# EAGLE board A+T Speed  Depth Interface V1_0 (EAGLE 8.4.0)
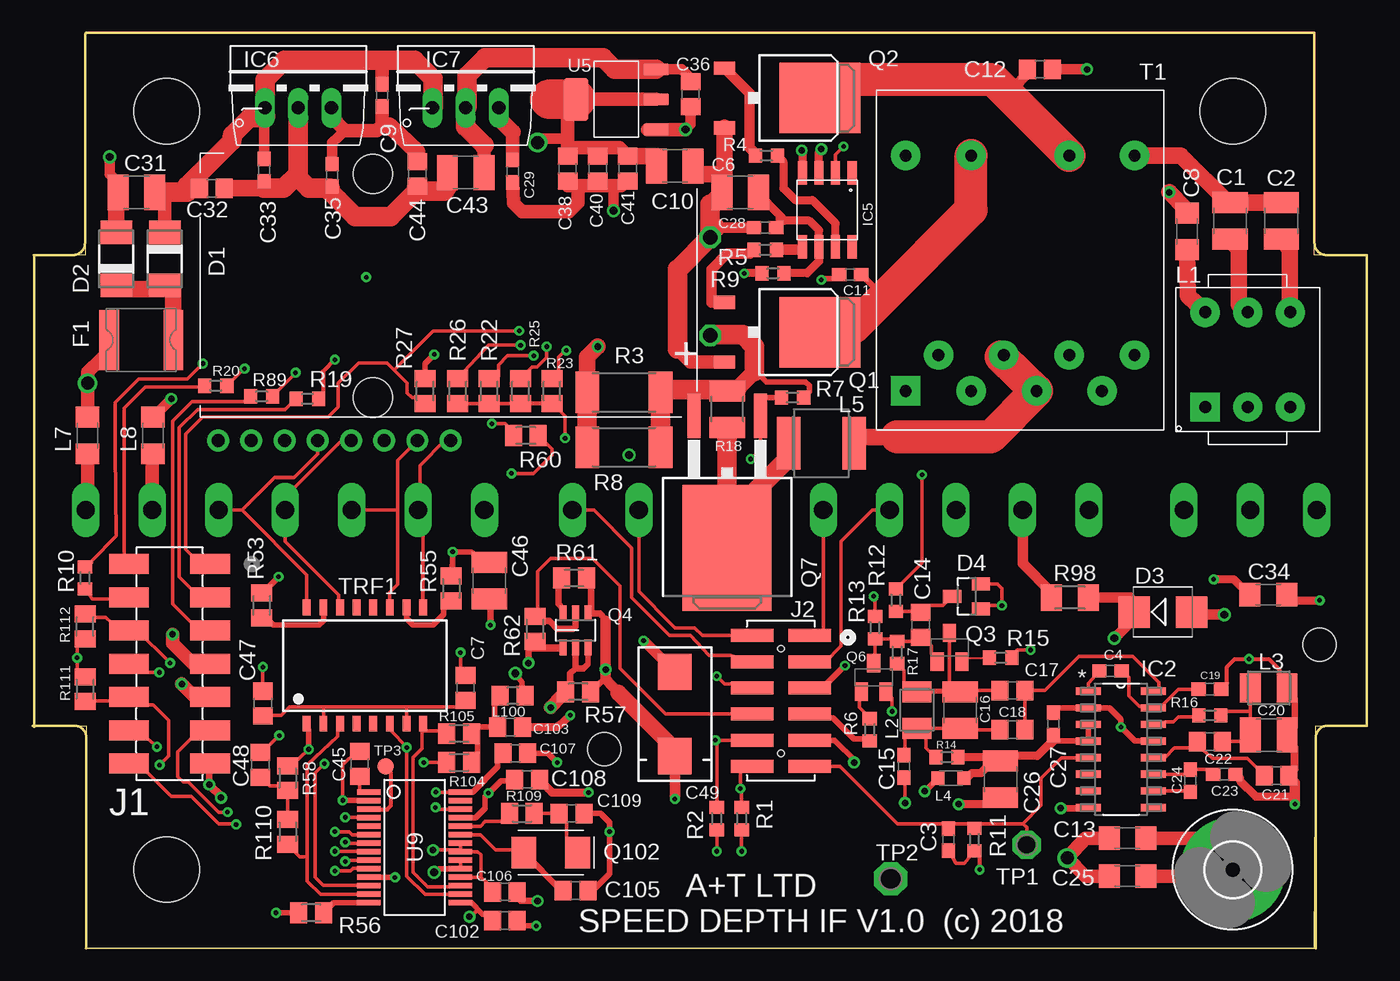
[diagram p0: board, top side]
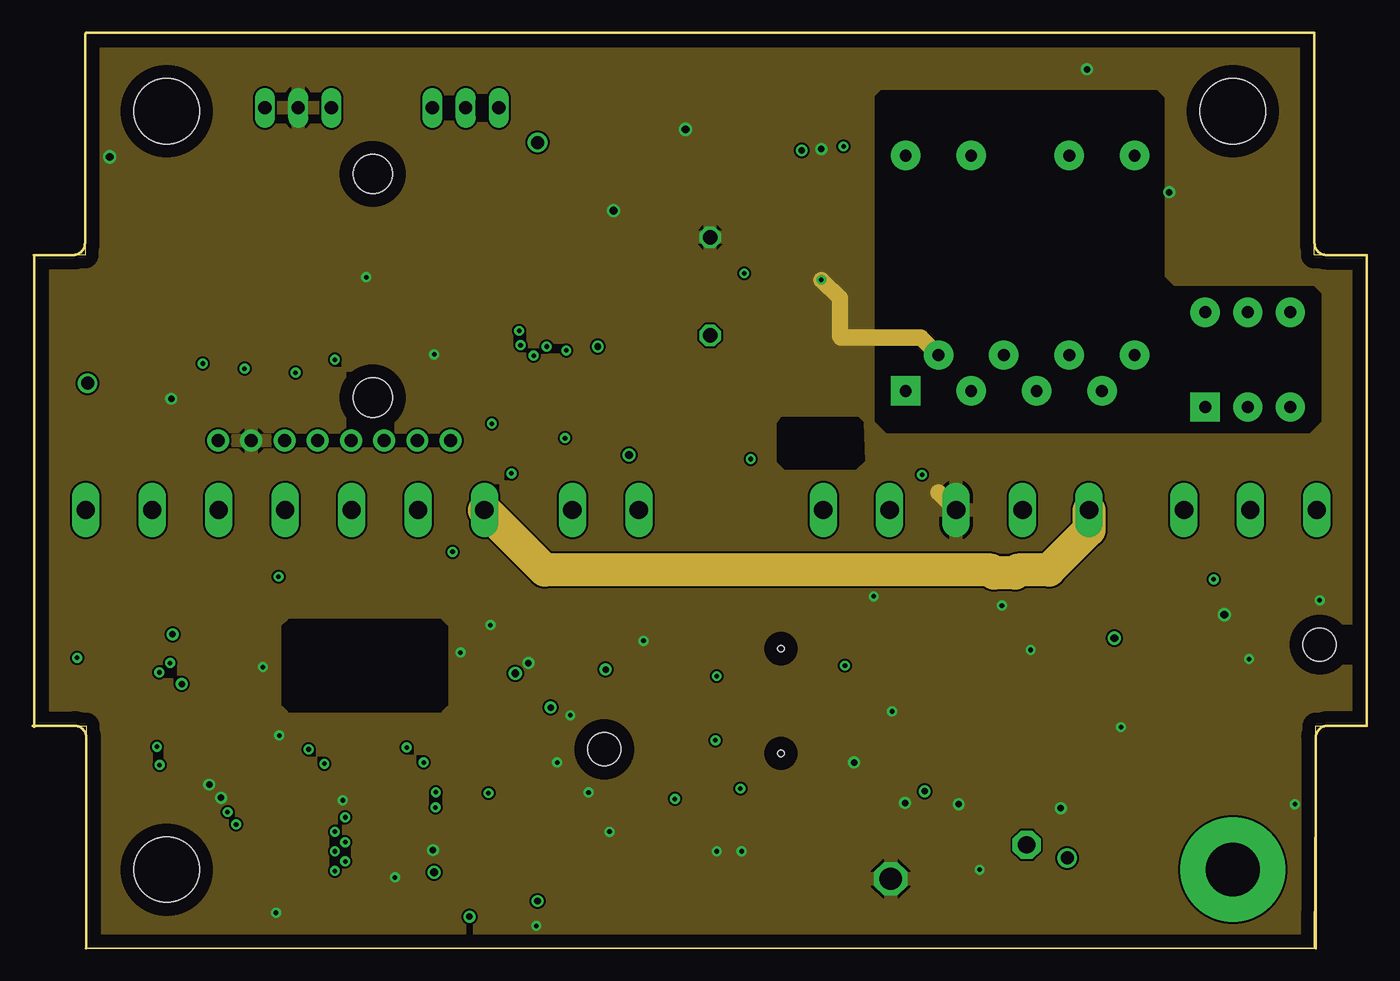
[diagram p1: board, inner layer GNDS]
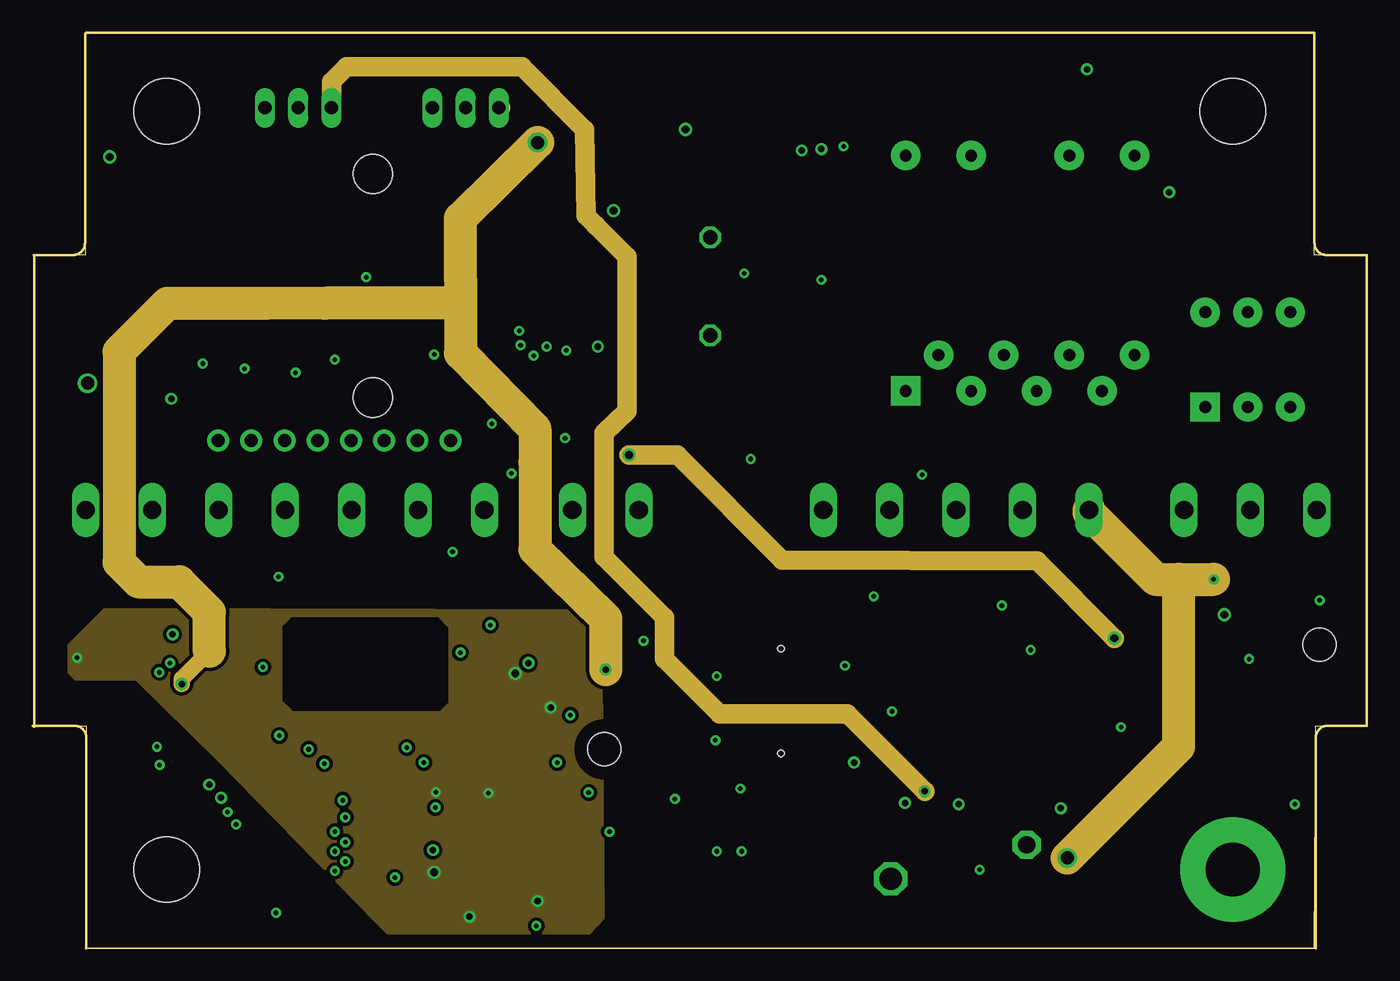
[diagram p2: board, inner layer POWER]
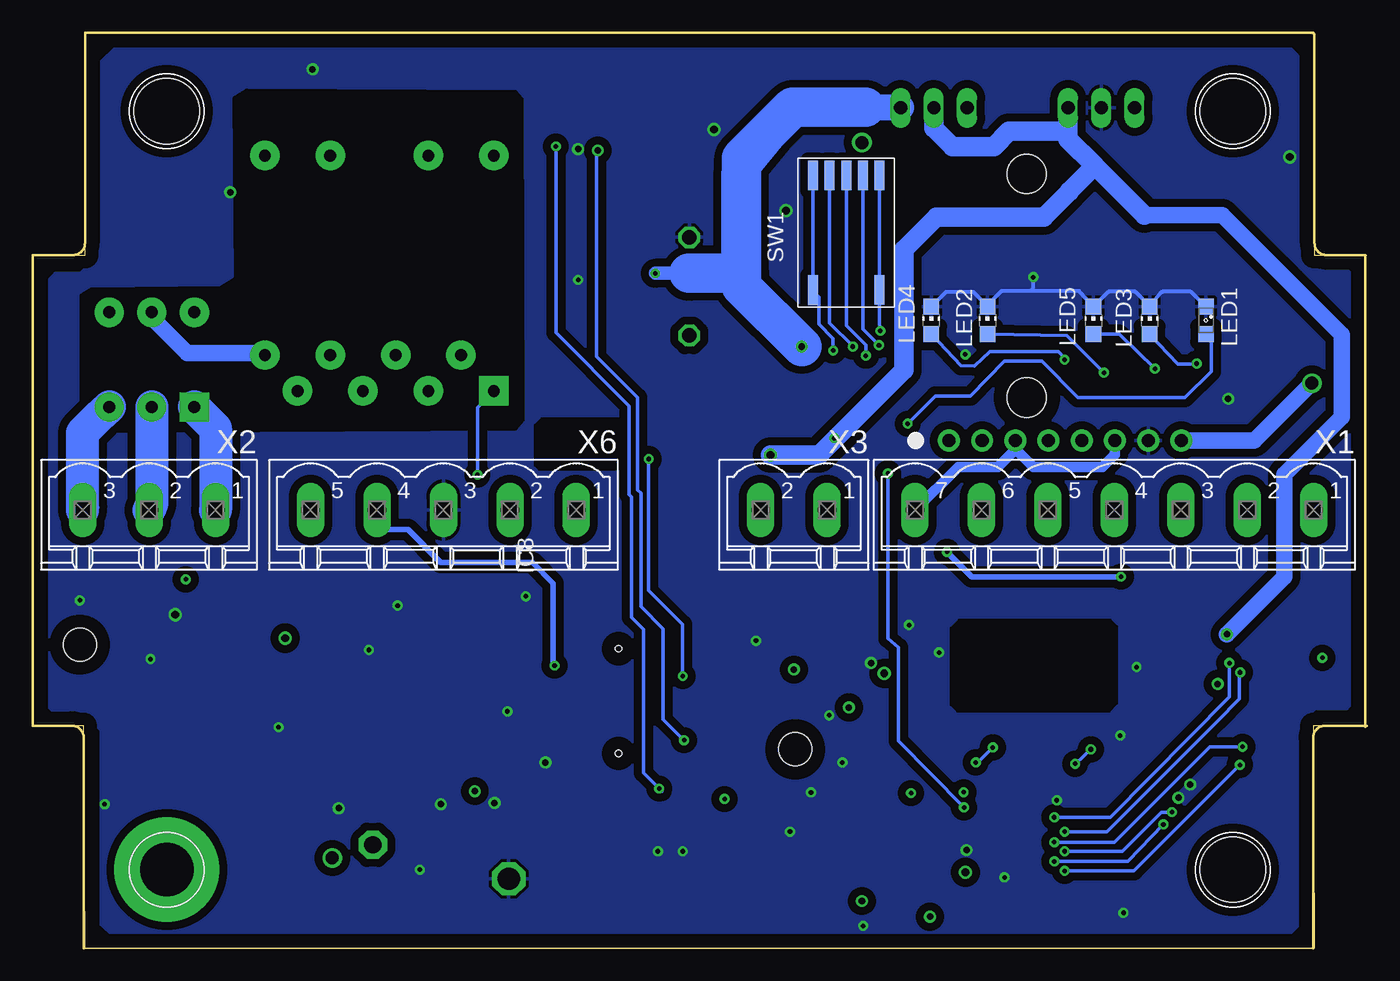
[diagram p3: board, bottom side, seen from below]

Size 102 x 70 mm. Coordinates in mm from the lower left corner, seen from the top.
Outline: 4.1,0 4,0 4.1,17 3.2,17
Outline: 4.1,0 98,0 98.1,17 98.6,17
Outline: 98.6,53 98,53 98,53.9
Outline: 4.1,70 4,70 4,53.9
Outline: 4,53.9 4,53 3.2,53
Outline: 3.2,53 3.1,53
Outline: 3.1,53 0.1,53
Outline: 0.1,53 0,53
Outline: 98,53.9 98,69.9 98,70 4.1,70
Outline: 98.1,0 98.1,16.1 arc-90 99,17 102,17 102,17.1 102,53 98.9,53 arc-90 98,53.9
Outline: 4.1,0 4.1,16.1 arc90 3.2,17
Outline: 0,17 3.2,17
Outline: 4,53.9 arc-90 3.1,53
Outline: 3.2,53 0.2,53 0.1,52.9
Outline: 0.1,52.9 0.1,53
Outline: 0.1,52.9 0.1,16.9
Outline: 4,53.9 4,69.9 4.1,70
Copper layers ((1*2)+(15*16)): Top 0.035mm / dielectric 0.5mm / GNDS 0.035mm / dielectric 0.5mm / POWER 0.035mm / dielectric 0.5mm / Bottom 0.035mm
Design rules "default *": minimum track width 6mil, minimum drill 0.35mm, track to track 6mil, track to pad 6mil, pad to pad 6mil, via to via 6mil, smd to smd 6mil, copper to edge 40mil, drill to drill 6mil, minimum pad ring 10mil, minimum via ring 8mil, stop-mask expansion 4mil, vias tented up to drill 30mil, thermal gap 10mil
Net classes: 1 GND: width 0.2 mm, drill 0.2 mm, clearance 0.2 mm to class 0, clearance 0.2 mm; 2 5V: width 0.2 mm, drill 0.2 mm, clearance 0.2 mm to class 0, clearance 0.2 mm; 3 3v3: width 0.2 mm, drill 0.2 mm, clearance 0.2 mm to class 0, clearance 0.2 mm to class 1, clearance 0.2 mm to class 2, clearance 0.2 mm
Holes 5 mm at 10.25,6 10.25,64 91.75,64
Holes 3 mm at 26,59.2 26,42.1
Holes 2.54 mm at 43.7,15.2 98.4,23.2
tKeepout: area 86.7,1 to 96.7,11; area 5.2,1 to 15.2,11; area 87.5,59.8 to 96,68.2; area 6,59.8 to 14.5,68.2; area 12.5,41.7 to 47,59.7; area 40.4,12.7 to 45.4,17.7; area 96,20.7 to 101,25.7; area 41.5,13 to 45.9,17.4

## Footprints (pad centres in the part's own frame; a part is rotated, then mirrored left to right if it is on the bottom)
C1210 = smd 1.6 x 2.7: 1 -1.4,0; 2 1.4,0
C0603 = smd 1.1 x 1: 1 -0.85,0; 2 0.85,0
CAPH38_20_75 = drill 1.1 octagon: P$1 -16,3.75; P$2 -16,-3.75
C0805 = smd 1.3 x 1.5: 1 -0.95,0; 2 0.95,0
C1206 = smd 1.6 x 1.8: 1 -1.4,0; 2 1.4,0
CAPC7343X31 = smd 2.77 x 2.55: + 3.22,0; - -3.22,0
DO-214AC = smd 1.8 x 2.4: A 2.025,0; C -2.025,0
SMB = smd 2.4 x 2.4: A 2.2,0; C -2.2,0
SOT23 = smd 1 x 1.4: 1 -0.95,-1.1; 2 0.95,-1.1; 3 0,1.1
MF-SMDF050 = smd 1.5 x 4.6: 1 -2.45,0; 2 2.45,0
4,1-PAD = drill 4.1 pad 8: B4,1 0,0
SOIC127P600X175-16N = smd 1.905 x 0.559: 1 -2.489,4.445; 2 -2.489,3.175; 3 -2.489,1.905; 4 -2.489,0.635; 5 -2.489,-0.635; 6 -2.489,-1.905; 7 -2.489,-3.175; 8 -2.489,-4.445; 9 2.489,-4.445; 10 2.489,-3.175; 11 2.489,-1.905; 12 2.489,-0.635; 13 2.489,0.635; 14 2.489,1.905; 15 2.489,3.175; 16 2.489,4.445
TC4428 = smd 1.8 x 0.7: !OUTA 2.84,0.635; !OUTB 2.84,-1.905; GND -2.84,-0.635; INA -2.84,0.635; INB -2.84,-1.905; NC -2.84,1.905; NC2 2.84,1.905; VDD 2.84,-0.635
OKI-78 = drill 1.016 long: 1 -2.54,-2.54; 2 0,-2.54; 3 2.54,-2.54
INTERFACE_BOARD = drill 1 pad 1.676: 1 19.05,3.81; 2 21.59,3.81; 3 24.13,3.81; 4 26.67,3.81; 5 29.21,3.81; 6 31.75,3.81; 7 34.29,3.81; 8 36.83,3.81
CONN_14WAY_SMT = smd 1.524 x 3.048: 1 10.16,-3.683; 2 10.16,2.54; 3 7.62,-3.683; 4 7.62,2.54; 5 5.08,-3.683; 6 5.08,2.54; 7 2.54,-3.683; 8 2.54,2.54; 9 0,-3.683; 10 0,2.54; 11 -2.54,-3.683; 12 -2.54,2.54; 13 -5.08,-3.683; 14 -5.08,2.54
CONN-12-WAY-SMT = smd 1 x 3.25: 1 4,-2.2; 2 4,2.2; 3 2,-2.2; 4 2,2.2; 5 0,-2.2; 6 0,2.2; 7 -2,-2.2; 8 -2,2.2; 9 -4,-2.2; 10 -4,2.2; 11 -6,-2.2; 12 -6,2.2 | hole 0.5: 3,0; -5,0
3CM_CHOKE = drill 0.9 pad 2.25 square: P$1 3.625,-3.25 | drill 0.9 pad 2.25: P$2 3.625,0; P$3 3.625,3.25; P$4 -3.625,3.25; P$5 -3.625,0; P$6 -3.625,-3.25
L3225M = smd 1.6 x 2.2: 1 -1.4,0; 2 1.4,0
L2012C = smd 1 x 1: 1 -1,0; 2 1,0
L5650M = smd 1.8 x 4: 1 -2.5,0; 2 2.5,0
INDC2012X90 = smd 1.3 x 1.5: 1 -0.95,0; 2 0.95,0
SML0805 = smd 1.2 x 1.2: A 1.05,0; C -1.05,0
CHIP-LED0805 = smd 1.2 x 1.2: A 0,-1.05; C 0,1.05
D-PAK_TO252AA = smd 1 x 1.6: 1 -2.28,-4.8; 3 2.28,-4.8 | smd 5.4 x 6.2: 4 0,2.5
SOT23-BEC = smd 1 x 1.4: B -0.95,-1.1; C 0,1.1; E 0.95,-1.1
SOT23-6 = smd 0.55 x 1.2: 1 -0.95,-1.3; 2 0,-1.3; 3 0.95,-1.3; 4 0.95,1.3; 5 0,1.3; 6 -0.95,1.3
TO263 = smd 1 x 3.4: 1 -2.54,-6.6; 2 2.54,-6.6 | smd 6.8 x 9.6: 3 0,3.5
ABRACON-ABM3 = smd 1.9 x 2.4: 1 -2.05,0; 2 2.05,0
R0603 = smd 1 x 1.1: 1 -0.85,0; 2 0.85,0
R2512 = smd 1.8 x 3.2: 1 -2.8,0; 2 2.8,0
R1210 = smd 1.6 x 2.7: 1 -1.4,0; 2 1.4,0
M0805 = smd 1.3 x 1.6: 1 -0.95,0; 2 0.95,0
M3216 = smd 1.6 x 2: 1 -1.4,0; 2 1.4,0
10_WAY_ROTARY_MCR7 = smd 2.261 x 0.762: 1 -4.378,1.27; 2 -4.378,-1.27; 4_1 -4.385,-2.54; 4_2 4.385,-2.54; 8 -4.385,0; C1 -4.385,2.54; C2 4.378,2.54
LEGACY = drill 0.9 pad 2.25 square: P$1 10,-8.75 | drill 0.9 pad 2.25: P$2 7.25,-6.25; P$3 10,-3.75; P$4 7.25,-1.25; P$5 10,1.25; P$6 7.25,3.75; P$7 10,6.25; P$8 7.25,8.75; P$9 -8,8.75; P$10 -8,3.75; P$11 -8,-3.75; P$12 -8,-8.75
P1-13 = drill 1.321 pad 2.159 octagon: TP 0,0
P1-17 = drill 1.702 pad 2.54 octagon: TP 0,0
B1,27 = smd 1.27 x 1.27: TP 0,0
N5 = smd 0.6 x 1.2: 1 -4.445,-4.445; 2 -3.175,-4.445; 3 -1.905,-4.445; 4 -0.635,-4.445; 5 0.635,-4.445; 6 1.905,-4.445; 7 3.175,-4.445; 8 4.445,-4.445; 9 4.445,4.445; 10 3.175,4.445; 11 1.905,4.445; 12 0.635,4.445; 13 -0.635,4.445; 14 -1.905,4.445; 15 -3.175,4.445; 16 -4.445,4.445
SOT230P700X180-4L = smd 0.89 x 1.88: 1 -2.3,-3.065; 2 0,-3.065; 3 2.3,-3.065 | smd 3.23 x 1.88: 4 0,3.065
SOP65P780X200-28N = smd 0.45 x 1.9: 1 -4.225,-3.505; 2 -3.575,-3.505; 3 -2.925,-3.505; 4 -2.275,-3.505; 5 -1.625,-3.505; 6 -0.975,-3.505; 7 -0.325,-3.505; 8 0.325,-3.505; 9 0.975,-3.505; 10 1.625,-3.505; 11 2.275,-3.505; 12 2.925,-3.505; 13 3.575,-3.505; 14 4.225,-3.505; 15 4.225,3.505; 16 3.575,3.505; 17 2.925,3.505; 18 2.275,3.505; 19 1.625,3.505; 20 0.975,3.505; 21 0.325,3.505; 22 -0.325,3.505; 23 -0.975,3.505; 24 -1.625,3.505; 25 -2.275,3.505; 26 -2.925,3.505; 27 -3.575,3.505; 28 -4.225,3.505
MSTBV7 = drill 1.397 long: 1 -15.24,0; 2 -10.16,0; 3 -5.08,0; 4 0,0; 5 5.08,0; 6 10.16,0; 7 15.24,0
MSTBV3 = drill 1.397 long: 1 -5.08,0; 2 0,0; 3 5.08,0
MSTBV2 = drill 1.397 long: 1 -2.54,0; 2 2.54,0
MSTBV5 = drill 1.397 long: 1 -10.16,0; 2 -5.08,0; 3 0,0; 4 5.08,0; 5 10.16,0

## Placement (x,y rotation side)
C1  22n 400V  [C1210]  91.54,55.6 270 top
C2  22n 400V  [C1210]  95.46,55.61 90 top
C3  1n  [C0603]  70,8.3 270 top
C4  100n  [C0603]  82.4,21.2 0 top
C5  CAPH38_20_75  [CAPH38_20_75]  35.8,50.6 180 top
C6  10u  [C1210]  54.1,57.8 180 top
C7  10n  [C0805]  33.1,19.9 90 top
C8  100n 100V  [C1206]  88.25,54.81 90 top
C9  100n  [C0603]  26.7,65.2 270 top
C10  47u,6.3V  [C1210]  49.1,59.8 0 top
C11  100n  [C0603]  62.5,51.5 180 top
C12  100n  [C0805]  77,67.2 0 top
C13  100n 100V  [C1206]  83.7,8.4 180 top
C14  1n  [C0805]  67.9,24.7 270 top
C15  100p  [C0603]  66.6,13.9 270 top
C16  6800p  [C1210]  70.9,18.2 90 top
C17  1n  [C0805]  74.9,19.7 0 top
C18  1n  [C0805]  74.9,16.7 0 top
C19  100n  [C0603]  90,19.8 0 top
C20  6800p  [C1210]  94.5,16.3 0 top
C21  1n  [C0805]  95.1,13.2 0 top
C22  1n  [C0805]  90,15.8 0 top
C23  100n  [C0603]  91.1,13.3 0 top
C24  100n  [C0603]  88.5,12.8 90 top
C25  100n 100V  [C1206]  83.7,5.5 180 top
C26  10u  [C1210]  73.99,12.91 270 top
C27  100n  [C0603]  78.05,17.15 90 top
C28  100n  [C0603]  56,55.1 180 top
C29  100n  [C0603]  36.7,59.4 270 top
C31  10u 35V  [C1210]  7.93,57.8 180 top
C32  DNF  [C0805]  13.7,58.1 0 top
C33  100n 50V  [C0603]  17.7,59.5 270 top
C34  100n 100V  [C1206]  94.47,27.01 0 top
C35  100n  [C0603]  22.9,59.1 270 top
C36  100n  [C0805]  50.3,65.3 270 top
C38  100n  [C0805]  40.9,59.6 270 top
C40  22u  [C0805]  43.2,59.6 90 top
C41  22u  [C0805]  45.5,59.6 90 top
C43  10u  [C1210]  33.1,59.3 180 top
C44  DNF  [C0805]  29.4,59.2 270 top
C45  10u  [C0805]  25,14.1 90 top
C46  1n 2kV  [C1210]  34.9,28.1 270 top
C47  10n  [C0805]  17.6,18.7 90 top
C48  100n  [C0805]  17.4,14 90 top
C49  220u  [CAPC7343X31]  49.1,17.9 270 top
C102  100n  [C0805]  36.1,2.1 0 top
C103  100n  [C0805]  36.5,16.9 0 top
C105  27p  [C0805]  41.5,4.4 0 top
C106  100n  [C0805]  36.1,4.3 180 top
C107  100n  [C0805]  36.9,14.9 0 top
C108  100n  [C0805]  37.8,12.9 0 top
C109  27p  [C0805]  41.2,10.3 0 top
D1  SS16  [DO-214AC]  10.1,52.7 270 top
D2  SMBJ36CA  [DO-214AC]  6.4,52.7 90 top
D3  SMBJ6.0A-M3/H  [SMB]  86.4,25.7 0 top
D4  BAV99  [SOT23]  71.4,26.9 90 top
F1  MF-SMDF050  [MF-SMDF050]  8.3,46.5 0 top
H3  MOUNT-PAD-ROUND4.1  [4,1-PAD]  91.75,6 0 top
IC2  SA614AD/01  [SOIC127P600X175-16N]  83.2,15.2 0 top
IC5  TC4427ACOA  [TC4428]  60.75,56.45 270 top
IC6  78SR_SWITCHING_REG05TV  [OKI-78]  20.3,66.8 0 top
IC7  78SR_SWITCHING_REG05TV  [OKI-78]  33.1,66.8 0 top
IC8  Toby B06-1X8 –AG1-G  [INTERFACE_BOARD]  51,35 0 bottom
J1  CONN-14WAY-SMT  [CONN_14WAY_SMT]  9.9,19.2 90 top
J2  CONN_12WAY_SMT  [CONN-12-WAY-SMT]  57.2,19.9 90 top
L1  custom  [3CM_CHOKE]  92.9,45 270 top
L2  120u  [L3225M]  67.6,18.2 90 top
L3  120u  [L3225M]  94.5,19.9 0 top
L4  2u2  [L2012C]  70.2,13 0 top
L5  SRN5040-3R3M  [L5650M]  60.3,38.6 0 top
L7  Laird HI1206T500R-1  [C1206]  4.2,39.2 90 top
L8  Laird HI1206T500R-1  [C1206]  9.2,39.2 90 top
L100  120R@100M  [INDC2012X90]  36.7,19.3 180 top
LED1  GRN  [SML0805]  12.3,48 270 bottom
LED2  [CHIP-LED0805]  29,48 0 bottom
LED3  [CHIP-LED0805]  16.6,48 0 bottom
LED4  [CHIP-LED0805]  33.3,48 0 bottom
LED5  [CHIP-LED0805]  20.9,48 0 bottom
Q1  FDD5670  [D-PAK_TO252AA]  57.7,47.1 270 top
Q2  FDD5670  [D-PAK_TO252AA]  57.7,65 270 top
Q3  BC848C  [SOT23-BEC]  70.1,23 0 top
Q4  TPS2708  [SOT23-6]  41.5,24.3 0 top
Q6  BC848C  [SOT23-BEC]  64.3,20.7 0 top
Q7  SUM110P06-08L  [TO263]  53.1,34.1 180 top
Q102  25MHz  [ABRACON-ABM3]  39.6,7.3 180 top
R1  1k  [R0603]  54.2,9.9 90 top
R2  1k  [R0603]  52.3,9.9 90 top
R3  15R  [R2512]  45.2,42.5 0 top
R4  100R  [R0603]  56.1,60.6 0 top
R5  100R  [R0603]  56,53.4 0 top
R6  1k  [R0603]  64,16.7 270 top
R7  1k  [R0603]  58.1,42.1 180 top
R8  15R  [R2512]  45.2,38.3 0 top
R9  10R  [R0603]  56.6,51.6 180 top
R10  1k  [R0603]  4,28.3 270 top
R11  56k  [R0603]  72,8.3 270 top
R12  1k  [R0603]  66,26.6 90 top
R13  22k  [R0603]  64.4,24.5 90 top
R14  1k  [R0603]  69.9,14.6 180 top
R15  820R  [R0603]  74,22.2 0 top
R16  1k  [R0603]  90,17.8 0 top
R17  33k  [R0603]  66.1,22.6 90 top
R18  10R  [R1210]  53.1,41.2 90 top
R19  1k  [R0603]  21,42 180 top
R20  1k  [R0603]  14,43 180 top
R22  1k  [M0805]  34.9,42.6 270 top
R23  2k  [M0805]  39.7,42.6 270 top
R25  4k02  [M0805]  37.3,42.6 270 top
R26  8k06  [M0805]  32.5,42.6 270 top
R27  1k  [M0805]  30,42.6 270 top
R53  75R  [M0805]  17.5,26.2 90 top
R55  75R  [M0805]  32,27.5 90 top
R56  2.32k 1%  [M0805]  21.3,2.7 0 top
R57  DNF  [M0805]  41.7,19.6 0 top
R58  49R9  [M0805]  19.5,13 90 top
R60  180R  [M0805]  37.7,39.2 0 top
R61  DNF  [M0805]  41.4,28.3 0 top
R62  100k  [M0805]  38.4,24.4 90 top
R89  1k  [R0603]  17.5,42.2 180 top
R98  100mA fuse for 50mA out  [M3216]  79.3,26.8 0 top
R104  49R9  [M0805]  32.6,14.2 180 top
R105  49R9  [M0805]  32.6,16.4 0 top
R109  100R  [M0805]  37.4,10.3 180 top
R110  49R9  [M0805]  19.5,8.9 90 top
R111  100k  [M0805]  4,19.8 90 top
R112  100k  [M0805]  4,24.6 270 top
SW1  10_WAY_ROTARY_MCR7  [10_WAY_ROTARY_MCR7]  39.8,54.7 270 bottom
T1  XFMR_DPT  [LEGACY]  75.5,52.6 270 top
TP1  TPPAD1-13  [P1-13]  76,7.9 90 top
TP2  PTR1PAD1-17  [P1-17]  65.6,5.3 0 top
TP3  TPB1,27  [B1,27]  27,13.9 0 top
TRF1  HX1188NL  [N5]  25.4,21.6 0 top
U5  AZ1117  [SOT230P700X180-4L]  44.6,64.9 90 top
U9  ENC28J60-SOP  [SOP65P780X200-28N]  29.2,7.7 270 top
X1  MSTBV7  [MSTBV7]  19.3,33.5 180 bottom
X2  MSTBV3  [MSTBV3]  93.1,33.5 180 bottom
X3  MSTBV2  [MSTBV2]  43.8,33.5 180 bottom
X6  MSTBV5  [MSTBV5]  70.6,33.5 180 bottom

## Library data of the parts
C1-C4 C6-C29 C31-C36 C38 C40 C41 C43-C48 C102 C103 C105-C109 L2-L5 L7 L8 R1-R20 R22 R23 R25-R27 R53 R55-R58 R60-R62 R89 R98 R104 R105 R109-R112 = rcl
C5 IC6-IC8 J1 J2 LED1 Q7 = AWR
C49 = Capacitors_AandT; DIGIKEY: 399-12105-1-ND; MANUFACTURER: Kemet; MOUSER: 80-T598D107M016E050; MPN: T598D107M016ATE050; PACKAGE: 7343; VOLTAGE: 16V
D1-D4 = diode
F1 = fuse
H3 = holes
IC2 = NXP SA614; MPN: SA614AD/01; OC_FARNELL: 2212075; OC_NEWARK: 55W4422; PACKAGE: SOIC-16; SUPPLIER: NXP
IC5 = mosefet Driver
L1 T1 = Wound A+T
L100 = IND_AandT; FARNELL: 1635711; MANUFACTURER: WURTH; MPN: 74279202; RS: 358-6721
LED2-LED5 = led
Q1 Q2 = MOSFET_N_TO252
Q3 Q6 = transistor-npn
Q4 = Transistor_AandT; FARNELL: 2323775; MANUFACTURER: TI; MARKING: AUA; MPN: TPS27081A; PACKAGE: SOT23-6; RS: 809-5429
Q102 = Crystals_AnT; FARNELL: 2101328
SW1 = AWR; FARNELL: 2083032; PART_NO: Multicomp MCR7M4-10RA-V-B
TP1-TP3 = testpad
TRF1 = Magnetics_AandT
U5 = ICs_AandT; MANUFACTURER: DIODES INC; MPN: AZ1117CH-3.3TRG1; PACKAGE: SOT223-3; RS: 828-7609
U9 = Microchip_AandT; DIGIKEY: ENC28J60-I/SS-ND; FARNELL: 1811239; MANUFACTURER: MICROCHIP; MPN: ENC28J60-I/SS; PACKAGE: SSOP-28; RS: 770-7755
X1 = con-phoenix-508; OC_FARNELL: unknown; OC_NEWARK: unknown
X2 = con-phoenix-508; MPN: MSTBV 2,5/3-GF-5.08; OC_FARNELL: 1792793; OC_NEWARK: 69R9846
X3 = con-phoenix-508; MPN: MSTBV 2,5/2-GF-5.08; OC_FARNELL: 1792792; OC_NEWARK: 69R9845
X6 = con-phoenix-508; MPN: MSTBV 2,5/5-GF-5.08; OC_FARNELL: 1792795; OC_NEWARK: 69R9848

## Nets
5V_SENSOR_SUPPLY: J2.5 R98.1 X6.4
+3V3: C10.1 C38.1 C40.2 C41.2 C49.+ J1.9 Q4.4 R57.2 R61.2 U5.2 U5.4
+5V: C9.2 C35.1 C36.1 C43.1 C44.1 D3.C IC6.3 IC7.2 J1.7 L4.1 R22.2 R23.2 R25.2 R26.2 R98.2 U5.3
+10V: C29.1 IC7.3 R3.1 R8.1 R9.2
+V_IN: F1.1 IC8.8 L7.2
ETHRX+: IC8.4 TRF1.14 X1.4
ETHRX-: IC8.5 TRF1.16 X1.3
ETHTX+: IC8.1 TRF1.9 X1.6
ETHTX-: IC8.2 TRF1.11 X1.5
GND: C3.2 C5.P$2 C6.2 C7.2 C8.2 C10.2 C11.2 C12.2 C15.2 C19.2 C20.2 C21.2 C23.2 C26.2 C27.2 C28.2 C29.2 C31.2 C32.2 C33.2 C34.2 C35.2 C36.2 C38.2 C40.1 C41.1 C43.2 C44.2 C45.2 C46.2 C47.2 C48.2 C49.- C102.2 C103.2 C105.2 C106.2 C107.2 C108.2 C109.2 D2.A D3.A D4.1 D4.2 IC2.2 IC2.8 IC2.13 IC5.GND IC6.2 IC8.7 J1.13 J2.9 L3.2 L8.2 LED1.C LED2.C LED3.C LED4.C LED5.C Q1.3 Q2.3 Q4.1 Q6.E R1.1 R2.1 R11.2 R13.2 R15.2 R27.1 R56.1 R62.1 T1.P$2 TP2.TP U5.1 U9.2 U9.11 U9.18 U9.21 U9.22 X6.3
LDA: LED1.A R60.1
LEDB: R60.2 U9.26
N$1: J2.7 R6.2
N$2: C109.1 Q102.1 R109.1
N$3: R55.1 TRF1.10
N$4: Q4.6 R61.1
N$5: IC2.14 R16.1
N$6: C4.1 IC2.1
N$7: C4.2 C19.1 IC2.15
N$8: C23.1 C24.2 IC2.11
N$9: C24.1 IC2.10
N$10: Q3.E R15.1
N$11: C20.1 C22.2 L3.1 R16.2
N$12: C15.1 C16.1 C18.1 L2.1 R14.2
N$13: C16.2 C17.1 L2.2 Q3.C R17.1
N$14: C14.2 Q3.B Q6.C R13.1 R17.2
N$15: C14.1 D4.3 R12.1
N$16: C8.1 L1.P$6
N$17: C11.1 Q1.4 T1.P$11
N$18: R12.2 T1.P$1
N$19: C12.1 Q2.4 T1.P$10
N$20: C6.1 C28.1 IC5.VDD R9.1
N$21: C1.2 L1.P$5 T1.P$8
N$22: C2.1 L1.P$4
N$23: C1.1 C2.2 T1.P$9
N$24: Q1.1 R5.1
N$25: Q2.1 R4.1
N$26: IC5.INA J2.12 R1.2
N$27: J1.2 R20.2
N$28: R109.2 U9.24
N$29: Q6.B R6.1
N$30: J2.2 X3.2
N$31: L7.1 X1.1
N$32: LED3.A R10.1
N$33: L1.P$3 X2.3
N$35: L1.P$2 X2.2
N$36: L1.P$1 X2.1
N$37: IC5.!OUTA R4.2
N$38: IC5.!OUTB R5.2
N$39: L5.1 Q7.3 R18.1
N$40: J1.3 R19.2
N$41: D1.A D2.C F1.2
N$42: J1.4 R10.2
N$43: R22.1 SW1.8
N$44: R23.1 SW1.4_1 SW1.4_2
N$45: R25.1 SW1.2
N$46: R26.1 SW1.1
N$47: J2.4 X3.1
N$48: L5.2 T1.P$4 T1.P$5
N$49: C5.P$1 Q7.2 R3.2 R7.1 R8.2 R18.2
N$51: LED2.A R89.1
N$52: IC5.INB J2.10 R2.2
N$53: LED4.A R19.1
N$55: LED5.A R20.1
N$56: J1.5 R89.2
N$57: C26.1 C27.1 IC2.3 IC2.4 L4.2 R14.1
N$59: L8.1 X1.2
N$64: C45.1 U9.1
N$67: C46.1 R53.2 R55.2
N$72: R53.1 TRF1.15
N$80: C7.1 C47.1 TRF1.2 TRF1.7
N$160: C48.1 R58.1 R110.2
OSC1: C105.1 Q102.2 U9.23
PHY3V3: C102.1 C106.1 C107.1 C108.1 L100.1 Q4.2 Q4.3 R57.1 R111.2 R112.2 U9.15 U9.19 U9.20 U9.25 U9.28
PHY-POWER: J2.8 Q4.5 R62.2
PHY_CS: J1.14 U9.9
PHY_INTERRUPT: J1.6 R112.1 U9.4
PHY_RESET: J1.10 R111.1 U9.10
PHY_SCK: J1.11 U9.8
PHY_SI: J1.12 U9.7
PHY_SO: J1.8 U9.6
PHYCLKOUT: TP3.TP U9.3
RBIAS: R56.2 U9.14
ROTARY_SWITCH: J1.1 R27.2 SW1.C1 SW1.C2
RSSI: C3.1 IC2.5 J2.11 R11.1 TP1.TP
RX1: C17.2 C18.2 IC2.16
RX2: C21.1 C22.1 IC2.12
SCREEN [GND]: C13.2 C25.2 C34.1 IC8.3 IC8.6 X1.7 X6.5
SCREEN1 [GND]: C13.1 C25.1 H3.B4,1
SPEED: J2.1 X6.1
TEMPERATURE: J2.3 X6.2
TP3V3: C103.1 L100.2 R104.1 R105.2
TPIN+: R110.1 TRF1.3 U9.13
TPIN-: R58.2 TRF1.1 U9.12
TPOUT+: R105.1 TRF1.8 U9.17
TPOUT-: R104.2 TRF1.6 U9.16
TX_POWER: J2.6 Q7.1 R7.2
VIN_FUSED [5V]: C9.1 C31.1 C32.1 C33.1 D1.C IC6.1 IC7.1

## Tracks (layer width: path | path; a pad name or v marks a point on that pad's centre or on a via)
5V_SENSOR_SUPPLY  (via drill 0.35)
  Top 0.406: J2.5 60.4,19.9 v62.1,21.6
  Top 0.813: 75.68,32.52 X6.4 75.7,33.48 75.7,29.4 77.9,27.2 R98.1
  Bottom 0.406: X6.4 74.9,32.72 74.9,32.1 74.8,32 73.3,32 70.8,29.5 63.8,29.5 62.2,27.9 62.2,21.7 v62.1,21.6
+3V3  (via drill 0.35, 0.5, 1)
  Top 0.254: 42.45,25.95 Q4.4 | 42.7,27.95 R61.2
  Top 0.508: 42.7,25.6 42.7,27.95 | 42.45,25.55 Q4.4 42.7,25.6 | R57.2 43.8,20.65 | 43.8,25 43.5,25.47 43.37,25.6 42.7,25.6
  Top 0.813: v49.1,11.4 C49.+ | 44.8,19.5 43.8,20.6 43.8,20.65 v43.8,21.3 43.8,25 | 40.9,61.9 38.9,61.9 v38.6,61.6
  Top 1.016: J1.9 12.4,19.2 v11.4,20.2 | U5.2 U5.4 41.14,64.9 40.9,64.66 40.9,61.9 40.9,60.6 | 40.9,60.6 C38.1 | 40.9,60.6 41.5,61.2 43.3,61.2 | 43.3,61.2 44.85,61.2 C41.2 | C40.2 43.2,61.09 43.3,61.2
  Top 1.27: C49.+ 48.9,15.4 44.8,19.5 | C41.2 47.75,60.55 C10.1
  Top 3: U5.4 39.5,64.9
  POWER 1.27: v11.4,20.2 11.4,20.6 13.5,22.7
  POWER 2.54: 32.7,51.2 32.7,45.5 38.4,39.7 38.4,37.15 38.4,30.5 43.8,25.2 v43.8,21.3 | 13.5,22.7 13.5,25.7 11.2,28 8.1,28 6.6,29.5 6.6,45.6 10.3,49.3 17.83,49.3 22.34,49.31 32.69,49.31 32.7,51.2 | v38.6,61.6 32.7,55.8 32.7,51.2
+5V  (via drill 0.35, 0.5, 0.6)
  Top 0.254: 37.38,41.65 R22.2 R26.2 | R23.2 39.75,41.65 40.7,40.7 v40.7,39
  Top 0.305: R23.2 37.38,41.65 R25.2
  Top 0.406: L4.1 v68.2,12
  Top 0.813: C35.1 22.9,61.6 23.9,62.5 | 27.3,62.9 26.92,62.9 26.7,63.12 | 33,64.26 IC7.2 | C36.1 50.55,66.25 49.6,67.2 U5.3 | R98.2 83.9,26.8 83.7,26.7 D3.C 83.6,24.6 v82.7,23.7
  Top 1.016: J1.7 12.26,21.74 10.7,23.3 v10.7,24 | C9.2 26.7,63.12 26.7,62.9 26.3,62.5 23.9,62.5 22.8,63.6 22.8,64.22 IC6.3 | C43.1 34.5,61.4
  Top 1.27: C44.1 29.4,60.9 27.3,62.9
  Top 1.5: U5.3 44.5,67.2 43.6,68.1 34.6,68.1 33.2,66.7 33.2,64.36 IC7.2 33.1,62.8 34.5,61.4
  POWER 1.5: IC6.3 22.84,66.24 24,67.4 37.4,67.4 42.2,62.6 42.3,56 43.09,55.21 42.99,55.32 45.44,52.87 45.44,41.06 43.7,39.4 43.7,29.9 48.3,25.3 48.3,22.1 52.5,17.9 62.3,17.9 v68.2,12 | v45.6,37.7 49.3,37.7 57.3,29.7 76.8,29.6 v82.7,23.7
  Bottom 0.254: 22.73,57.85 22.73,57.87
  Bottom 1.27: 17.01,56.05 11.05,56.05 1.9,46.9 1.9,40.6 6.3,36.2 6.3,28.4 v10.7,24 | v40.7,39 40.7,38.9 41.9,37.7
  Bottom 1.5: 33.1,64.2 IC7.2 33.1,62.7 31.7,61.3 28.52,61.3 27.35,62.47 23.3,62.47 22.84,62.93 | 22.84,62.93 22.84,61.88 20.78,59.82 | 17.01,56.05 20.78,59.82 | v45.6,37.7 41.9,37.7 35.4,44.2 35.4,53.4 32.9,55.9 24.68,55.9 22.73,57.85 | 22.73,57.87 20.78,59.82 | IC6.3 22.84,62.93
+10V  (via drill 0.35, 0.5)
  Top 0.61: R9.2 v54.4,51.6
  Top 1.016: 35.6,64.22 IC7.3 35.7,64.2 35.7,63.4 | C29.1 36.7,62.4
  Top 1.27: R3.1 42.4,45.2 v43.2,46 | 36.7,62.4 35.7,63.4
  Top 1.5: R3.1 R8.1
  POWER 1.5: IC7.3 35.76,64.26
  Bottom 0.61: 47.8,51.6 47.5,51.7
  Bottom 1.016: 51.82,51.6 v54.4,51.6 | 48.45,51.6 47.8,51.6
  Bottom 2: 38.31,64.3 35.6,64.3 IC7.3
  Bottom 2.54: v43.2,46 45.4,48.2 | 51.82,51.6 48.45,51.6 48.1,51.95 48.1,59.2 43.9,64.3
  Bottom 3: 47.8,51.6 47.8,60.4 43.9,64.3 38.31,64.3 | 47.8,51.6 47.8,50.6 v43.2,46 | 47.8,51.6 51.82,51.6
+V_IN  (via drill 1)
  Top 1.016: L7.2 v4.2,43.2 4.2,44.05 5.2,45 5.85,45.65 F1.1
  Bottom 1.27: v4.2,43.2 8.59,38.81 IC8.8
ETHRX+
  Top 0.254: 23.58,26.13 TRF1.14 23.4,26.14 23.4,27 19.3,31.1 X1.4 19.4,33.6 19.4,34.6 23.61,38.81 IC8.4
ETHRX-
  Top 0.254: IC8.5 21.79,37.79 20,36 18.5,36 16,33.5 | TRF1.16 20.95,28.55 16,33.5 | 16,33.5 X1.3
ETHTX+
  Top 0.254: 29.84,30.03 29.84,33.12 29.48,33.48 | 29.48,33.48 X1.6 | IC8.1 31.51,38.81 29.6,36.9 29.6,33.6 29.48,33.48
  Top 0.305: TRF1.9 29.84,30.03
ETHTX-
  Top 0.254: IC8.2 27.9,37.29 27.9,33.6 | 27.9,33.6 27.9,27.8 27.3,27.2 TRF1.11 | X1.5 27.8,33.5 27.9,33.6
GND  (via drill 0.35, 0.5, 0.6)
  Top 0.152: 95.5,19.3 L3.2 96,19.3 | 80.2,10.7 80.7,10.7 IC2.8
  Top 0.254: U9.22 U9.21 | U9.21 32.58,7.5 v30.6,7.5 | U9.21 34.02,7.38 34.27,7.12 34.27,5.42 | C15.2 66.7,12.95 v66.7,11.1 | D4.1 72.55,26 73,26 73.2,26.2 v74.1,26.2 74.1,27.5 73.75,27.85 D4.2 | R13.2 64.4,26.6 64.5,26.7 v64.3,26.9 | R15.2 74.9,22.2 75.3,22.8 v76.3,22.8 | Q6.E 65.7,19.15 v65.7,18.1 | C3.2 70.05,7.45 70.6,6.5 71.25,6.5 R11.2 | 72.4,6.5 v72.4,6 | 60.12,60.91 v60.3,61.1 | C45.2 24.75,15.05 23.7,14 v23.7,11.3 | C48.2 17.55,14.95 v18.85,16.25 18.9,16.3 | C47.2 v17.6,21.5 | C7.2 32.8,21 32.7,21.1 v32.7,22.6 | 34.92,4.72 C106.2 35.35,4.45 34.27,5.42 | 34.27,5.42 U9.18 | R2.1 v52.3,7.4 | R1.1 v54.2,7.4 | 14.4,11.6 v14.4,11.5 | C35.2 22.88,58.25 22.73,58.1
  Top 0.305: C19.2 91.3,20.25 91.3,21.5 91.9,22.1 v93,22.1 94.5,22.1 95.3,21.3 95.3,20.7 95.9,20.1 L3.2 | v72.4,6 72.4,7.05 R11.2
  Top 0.406: C27.2 78.42,18.38 IC2.2 82.33,18.38 83.2,17.5 v83.2,16.9 84.27,15.84 IC2.13 | R56.1 v18.6,2.7 | U9.11 27.48,5.42 27.5,5.4 v27.7,5.4 | 25.72,11.3 U9.2 25.67,11.3 v23.7,11.3 | C102.2 37.45,1.7 v38.5,1.7 | C105.2 42.8,4.4 44.1,5.7 v44.1,8.9 44.1,9.6 43.4,10.3 C109.2 | C108.2 38.75,12.85 | C107.2 39.4,14.9 v40.1,14.2 | C11.2 61.35,51.2 60.5,51.2 60.4,51.1 v60.3,51.1 | R27.1 30,44.7 v30.7,45.4 | C34.2 96.33,26.6 | J2.9 61.3,15.9 62.9,14.3 v62.8,14.2
  Top 0.508: C20.2 96.5,16.9 96.5,19.07 95.81,19.76 95.81,19.81 L3.2 | IC2.8 80.66,10.7 v78.6,10.7 | C46.2 35,26.6 v35,24.7 | R62.1 38.85,23 Q4.1 40.35,22.9 37.9,22.9 v37.9,21.8 | 40.1,16.9 40.2,17 | J1.13 13.48,13.82 v13.5,12.5
  Top 0.61: C26.2 73.48,11 v70.8,11 | C21.2 96.45,13.7 96.48,13.7 96.48,15.32 C20.2 | C23.2 92,13.3 92.3,13 92.3,12.8 93.5,11.6 96.5,11.6 96.5,12.6 96,13.15 C21.2 | C21.2 96.05,13.05 | IC5.GND 60.12,60.91 | C103.2 40.1,16.9 | 40.2,17 v41.1,17.8 | 38.75,12.85 39.7,11.9 v42.5,11.9 | v13.5,12.5 14.4,11.6 | 96.33,26.6 v98.4,26.6
  Top 0.813: C28.2 52.19,55.1 51.68,55.1 | C12.2 v80.6,67.2 | v96.51,11 96.51,12.64 96,13.15 | L8.2 v10.6,42 | C49.- 46.92,23.3 v46.7,23.5 | C33.2 17.7,58.12 17.68,58.1 | 23.4,57.28 23.35,57.23 | C44.2 29,58.22 29.32,57.9 | C36.2 50.3,63 v49.9,62.6 | 44.4,58.3 v44.4,56.4 | C31.2 6.53,58.57 5.9,59.2 v5.9,60.5 | D3.A 89.3,25.5 v91.1,25.5
  Top 1.016: Q1.3 50.28,44.82 49.3,45.8 | 47,62.6 U5.1 v49.9,62.6 | C41.1 45.35,58.65 45,58.3 44.4,58.3 43.17,58.3 | 41.64,58.3 43.17,58.3 | 41.64,58.3 40.92,58.3 40.9,58.32 C38.2 | C40.1 43.2,58.33 43.17,58.3 | C29.2 36.75,57.05 36.75,56.95 37.4,56.3 41,56.3 41.7,57 41.7,58.24 41.64,58.3
  Top 1.27: C8.2 88.14,56.56 v86.9,57.8 | 51.78,56.88 C6.2 52.7,58.8 52.9,59 52.9,59.85 | D2.A 6.4,57.37 C31.2 | 52.9,59.85 Q2.3 | C10.2 50.5,59.5 50.7,59.2 52.85,59.2 52.9,59.85 | C32.2 17.68,58.1
  Top 1.5: 49.3,45.8 49.3,51.92 49.37,51.92 C5.P$2 | 17.68,58.1 19.2,58.1 20.3,59.2 | IC6.2 20.3,59.2 | 20.3,59.2 20.3,58.9 21.1,58.1 22.73,58.1 22.73,57.85 23.35,57.23 24.65,55.93 27.35,55.93 29.32,57.9 31.5,57.9 31.7,58.2 C43.2 | 51.78,56.88 51.78,54.37 C5.P$2 | C5.P$2 51.8,54.71 52.19,55.1
  GNDS 1.27: 69.25,34.85 X6.3 | T1.P$2 67.9,46.7 61.8,46.7 61.7,46.8 61.7,49.7 v60.3,51.1
  Bottom 0.254: 29.03,49.12 LED2.C
  Bottom 0.305: 25.55,50.25 22,50.25 LED5.C 19.75,50.2 17.7,50.2 LED3.C 15.7,50.15 15.6,50.2 13.45,50.2 LED1.C | LED4.C 32.15,50.2 30.11,50.2 29.03,49.12 27.92,50.24 27.71,50.25 25.55,50.25 | v25.5,51.3 25.5,51.2 25.55,50.25
  pour GNDS: -11.2,92.6 112.2,92.6 123.6,81.2 123.6,6.4 84.4,-32.8 -9,-32.8 -38,-3.8 -38,65.8
  pour Bottom (isolate 0.61): 5,53.3 5,68 6.1,69.2 95.4,69.2 97.1,67.5 97.1,52.9 98.4,51.6 100.3,51.6 101.2,50.7 101.2,18.8 100.1,17.7 97.9,17.7 96.8,16.6 96.8,1.8 95.9,0.9 6,0.9 5,1.9 5,17.2 3.9,18.3 1.5,18.3 0.8,19 0.8,51.2 1.7,52.1 3.8,52.1
LDA  (via drill 0.35)
  Top 0.254: R60.1 36.75,39.45 36.1,40.1 v35.1,40.1
  Bottom 0.254: 35.2,40 v35.1,40.1 33,42.2 30.3,42.2 27.7,44.9 24.84,44.9 22.1,42.1 13.9,42.1 11.9,44.1 11.9,46.6 12.1,46.8 LED1.A
LEDB  (via drill 0.35)
  Top 0.254: U9.26 30.82,10.62 30.8,10.6 v30.8,10.76 | R60.2 39.7,38.15 39.7,37.7 38.3,36.3 v36.6,36.3
  Bottom 0.254: v36.6,36.3 36.6,23.9 36.6,23.7 35.8,23 35.8,15.86 v30.8,10.76
N$1
  Top 0.254: 63.75,15.7 R6.2
  Top 0.406: R6.2 63.85,16 62.8,16 61.2,17.6 60.6,17.6 60.3,17.9 J2.7
N$2
  Top 0.254: R109.1 C109.1 40.8,9.55 40.8,7.9 41.4,7.3 Q102.1
N$3
  Top 0.406: TRF1.10 28.57,25.23 29.1,24.7 30.6,24.7 31.4,25.5 31.4,26.15 R55.1
N$4
  Top 0.508: Q4.6 40.55,25.95 40.2,26.3 40.2,28.05 R61.1
N$5
  Top 0.254: IC2.14 86.41,17.11 86.6,17.3 87.2,17.3 87.6,17.7 89.05,17.7 R16.1
N$6
  Top 0.254: C4.1 80.71,20.26 IC2.1
N$7
  Top 0.152: 86.2,18.2 85.86,18.2 IC2.15 85.03,18.38
  Top 0.254: C4.2 83.35,21.15 83.8,20.7 83.8,19.3 84.6,18.5 85.56,18.5 IC2.15 86.17,18.38 87.6,19.8 C19.1
N$8
  Top 0.254: IC2.11 88.36,13.29 88.28,13.68 | 88.28,13.68 C24.2 | C23.1 90.28,13.68 88.28,13.68
N$9
  Top 0.254: C24.1 88.42,12.03 IC2.10
N$10
  Top 0.152: R15.1 71,22.2 Q3.E
N$11
  Top 0.254: 93.1,16.4 C20.1 | 93.1,16.4 93.1,18.1 | 93.1,18.1 L3.1 | 93.1,18.1 91.15,18.1 R16.2 | C22.2 92.5,15.8 93.1,16.4
N$12
  Top 0.254: 68.3,16.8 L2.1 66.8,16.8 66.7,16.7 66.7,14.85 C15.1 | 68.3,16.8 C16.1 71,16.7 C18.1 | R14.2 68.3,15.3 68.3,16.8
N$13
  Top 0.254: Q3.C 70.1,19.7 67.5,19.7 | 67.5,19.7 L2.2 C16.2 71,19.7 C17.1 | R17.1 66.6,21.25 66.6,20 66.9,19.7 67.5,19.7
N$14
  Top 0.254: 67.85,23.54 68.35,23.4 68.7,23.1 68.7,22.5 69.15,22.05 Q3.B | 67.85,23.54 C14.2 | Q6.C 64.4,21.9 R13.1 65.9,23.65 R17.2 67.76,23.45 67.85,23.54
N$15
  Top 0.254: D4.3 69.6,26.2 68.2,26.2 67.9,25.9 C14.1 67.8,25.75 R12.1
N$16
  Top 1.27: C8.1 88.3,49.9 L1.P$6
N$17
  Top 0.406: C11.1 64.95,49.9 64.95,49.65
  Top 0.813: 58,46.6 59.6,46.7 Q1.4
  Top 2.54: Q1.4 61.6,48.1 62.8,47.5 64.95,49.65 71.75,56.45 T1.P$11
N$18  (via drill 0.35)
  Top 0.254: 66.85,28.3 R12.2 68,29.45 v68,36.2
  Bottom 0.254: T1.P$1 68,41.35 v68,36.2
N$19
  Top 0.152: Q2.4 59.98,64.69 57.5,63.2
  Top 0.813: C12.1 76.05,66.85 75,65.8 73.85,65.8 73.45,66.4
  Top 1.27: 60.5,66.7 Q2.4
  Top 2.54: T1.P$10 73.45,66.4 59.6,66.4 59.98,65.61 59.98,64.69
N$20
  Top 0.61: 55.95,57.15 C6.1 55.5,57.7 57.12,56 | 57.12,56 57.48,55.62 59.38,55.62 60.12,54.88 IC5.VDD 60.12,52.52 59.2,51.6 R9.1 | 56.65,55.1 C28.1 57.12,55.37 57.12,56
N$21
  Top 1.27: C1.2 92.2,53.4 92.2,49.2 L1.P$5 92.55,49.12
  Bottom 1.27: L1.P$5 92.9,48.2 90.2,45.5 84.8,45.5 T1.P$8
N$22
  Top 1.27: C2.1 96.1,53.4 96.1,49.9 L1.P$4
N$23
  Top 1.27: C2.2 95.75,57 C1.1 91.4,57 87.8,60.6 T1.P$9
N$24
  Top 0.813: Q1.1 51.9,49.38 51.9,51.9 53.1,53.1 54.85,53.1 R5.1
N$25
  Top 0.508: 55.25,60.75 R4.1
  Top 0.813: 55.25,60.75 54.8,61.2 54.8,65.38 Q2.1
N$26  (via drill 0.35)
  Top 0.254: IC5.INA 61.38,60.69 v62,61.3 | J2.12 54.9,14 54.3,14 54.1,13.8 v54.1,12.2 54.2,12.1 R1.2
  Bottom 0.254: v62,61.3 62,47.05 56.4,41.45 56.4,34.7 56.2,34.5 56.2,25.28 55.3,24.38 55.3,13.4 v54.1,12.2 53.9,12
N$27
  Top 0.254: J1.2 7,29.72 7,41.3 8.6,42.9 13.05,42.9 R20.2
N$28
  Top 0.254: U9.24 34.23,9.32 34.6,9.7 36.05,9.7 R109.2
N$29
  Top 0.254: R6.1 64.05,17.55 63.2,18.4 63.2,19.45 Q6.B
N$30
  Top 0.254: 48.85,24.75 49,24.6 | 48.85,24.75 46.34,27.26 X3.2 | J2.2 51.2,23.9 50.6,24.5 49.1,24.5 48.85,24.75
N$31
  Top 1.016: X1.1 4.2,33.64 L7.1
N$32  (via drill 0.35)
  Top 0.254: R10.1 4.3,29.3 4.5,29.5 4.5,29.6 6.4,31.5 6.3,38 6.3,41.7 8.1,43.5 11.8,43.5 v13,44.7
  Bottom 0.254: v13,44.7 12.8,44.65 14.45,44.65 15.9,46.2 LED3.A
N$33
  Bottom 2.54: L1.P$3 97.03,40.58 98.2,39.4 98.2,33.88 X2.3
N$34
  cutout Bottom: 86.6,65 85.6,65.6 65.1,65.5 64.6,64.9 64.5,40.4 65.1,39.7 97.7,39.5 97.7,39.6 98.3,40.2 98.3,49.9 97.5,50.4 87.6,50.5 86.5,51.2
N$35
  Bottom 2.54: L1.P$2 92.9,34 X2.2
N$36
  Bottom 2.54: L1.P$1 88.02,39.74 X2.1
N$37
  Top 0.61: IC5.!OUTA 61.38,55.38 61.4,55.4 59.6,57.2 58.3,57.2 57.4,58.1 57.4,60.15 R4.2
N$38
  Top 0.61: IC5.!OUTB 58.8,53.56 58.8,53.5
  Top 0.813: R5.2 58.6,53.4 58.8,53.5
N$39
  Top 1.016: Q7.3 54.6,34.3 | 57.5,37.2 57.7,38.5 L5.1
  Top 1.5: R18.1 Q7.3 | 54.6,34.3 57.5,37.2
N$40
  Top 0.254: J1.3 13,27.4 12.2,27.4 11.2,28.4 11.2,39.8 12.6,41.2 19.3,41.2 19.95,41.85 R19.2
N$41
  Top 1.27: 10.75,50.4 F1.2 | 10.75,50.4 10.45,50.73 D1.A | D2.C 6.38,50.4 10.75,50.4
N$42
  Top 0.254: R10.2 4.55,26.7 6.9,26.7 7.36,26.76 J1.4
N$43  (via drill 0.35)
  Top 0.254: v38.3,45.3 36.3,45.3 35.6,44.6 35.6,43.7 34.95,43.65 R22.1
  Bottom 0.254: SW1.8 39.8,47.6 38.3,46.1 v38.3,45.3
N$44  (via drill 0.35)
  Top 0.254: R23.1 39.95,43.55 40.2,43.8 40.2,45.2 40.7,45.7 v40.8,45.7
  Bottom 0.254: SW1.4_1 SW1.4_2 42.34,50.24 41.9,49.8 41.9,47.7 40.8,46.6 v40.8,45.7
N$45  (via drill 0.35)
  Top 0.254: 37.35,43.55 R25.1 | 37.45,43.55 R25.1 | R25.1 38.19,44.44 38.57,44.44 39.3,45.17 v39.3,46
  Bottom 0.254: SW1.2 41.07,47.8 39.3,46.03 v39.3,46
N$46  (via drill 0.35)
  Top 0.254: 33.1,44 32.95,44 R26.1 34.85,46.1 v37.3,46.1
  Bottom 0.254: v37.3,46.1 38.53,47.33 SW1.1
N$47
  Top 0.254: X3.1 42.9,33.5 45.8,30.6 45.8,26.8 48.7,23.9 50.3,23.9 51.7,22.4 53.4,22.4 J2.4
N$48
  Top 1.27: 66.1,39.1 62.8,39.1 L5.2
  Top 1.5: T1.P$4 74.05,45.2 | T1.P$5 77.1,42.2
  Top 2.54: 74.05,45.2 T1.P$5 73.25,39.1 66.1,39.1
N$49
  Top 0.406: R7.1 59.4,42.55 59.4,43 59.1,43.3 56.1,43.3 55.4,44 55.2,44.1
  Top 1.016: Q7.2 50.56,42.75 49.71,42.7 | R18.2 53.7,42.6 53.8,42.7
  Top 1.27: 53.8,42.7 55.2,44.1
  Top 1.5: R8.2 R3.2 47.8,42.7 49.71,42.7 53.8,42.7 | 55.2,44.1 55.2,46 54.3,46.9 51.85,46.9 C5.P$1
N$50
  cutout POWER: 64.5,65.6 86.5,65.6 86.5,51.2 87.2,50.5 98.1,50.5 98.5,50.1 98.5,39.9 98.2,39.6 65,39.6 64.5,40.1
N$51  (via drill 0.35)
  Top 0.254: R89.1 20,43.85 20.1,43.9 v20.1,44
  Bottom 0.254: LED2.A 22.95,46.85 v20.1,44
N$52  (via drill 0.35, 0.5)
  Top 0.254: J2.10 v52.2,15.9 52.3,15.8 R2.2
  Top 0.61: IC5.INB 58.84,60.95 v58.8,61
  Bottom 0.254: v58.8,61 58.9,60.9 58.9,45.24 55.75,42.09 55.75,35.05 55.5,34.8 55.5,26.12 53.8,24.42 53.8,17.5 v52.2,15.9
N$53  (via drill 0.35)
  Top 0.305: v23.1,45 22.2,44.1 22.2,42.4 21.85,42.05 R19.1
  Bottom 0.254: LED4.A 31.05,44.55 30,44.5 28.8,45.6 23.6,45.6 23.1,45.1
  Bottom 0.305: 23.15,45.1 23.1,45.1 v23.1,45
N$54
  cutout GNDS: 64.5,65.1 64.9,65.5 85.9,65.5 86.4,65 86.4,51.3 87.2,50.5 97.9,50.5 98.4,50 98.4,40.3 97.6,39.5 65.3,39.5 64.5,40.3
N$55  (via drill 0.35)
  Top 0.254: R20.1 16.16,44.31 v16.2,44.31
  Bottom 0.254: LED5.A 18.94,46.95 v16.2,44.31
N$56
  Top 0.254: J1.5 12.96,24.9 12.1,24.9 10.7,26.3 10.7,40.3 12.2,41.8 16.55,41.8 R89.2
N$57
  Top 0.406: 78.06,15.84 IC2.4 IC2.3
  Top 0.61: C27.1 77.85,15.75 77.6,15.5 | 77.6,15.5 76.8,14.7 74.38,14.7 C26.1 73.7,14.6 | 73.7,14.6 R14.1 | L4.2 71.4,13 71.8,13.4 72.5,13.4 73.7,14.6 | 77.6,15.5 77.73,15.5 78.06,15.84
N$58
  cutout GNDS: 57.5,36.7 62.9,36.7 63.5,37.3 63.4,40.2 63.1,40.5 57.3,40.5 57,40.1 57,37.2
N$59
  Top 1.016: X1.2 9.14,37.74 L8.1
N$60
  cutout POWER: 63.2,40.5 57.7,40.5 57.1,39.9 57.1,37.2 57.6,36.7 63.1,36.7 63.7,37.3 63.7,40
N$61
  cutout Bottom: 56.9,40.1 57.3,40.5 63.1,40.5 63.6,40 63.6,36.9 63.3,36.6 57.4,36.6 56.9,37.1 56.9,40
N$62
  cutout POWER: 19.8,25.2 31,25.2 31.7,24.5 31.7,18.8 31.1,18.2 19.9,18.2 19.2,18.9 19.2,24.6
N$63
  cutout GNDS: 19.2,24.7 19.6,25.1 31.2,25.1 31.7,24.6 31.7,18.6 31.2,18.1 19.6,18.1 19.1,18.6 19.1,24.6
N$64
  Top 0.254: C45.1 25,12 24.9,11.9 25.67,11.9 U9.1
N$65
  cutout Bottom: 19.6,25.1 31.2,25.1 31.8,24.5 31.8,18.6 31.3,18.1 19.7,18.1 19.1,18.7 19.1,24.6
N$67  (via drill 0.35)
  Top 0.406: R53.2 17.5,27.1 v18.8,28.4 | C46.1 33.5,30.3 v32.1,30.3 | v32.1,30.3 32.05,28.45 R55.2 32.1,28.6 v32.1,30.3
  Bottom 0.406: v18.8,28.4 30.2,28.4 v32.1,30.3
N$72
  Top 0.406: TRF1.15 22.23,25.02 21.9,24.7 18.4,24.7 17.85,25.25 R53.1
N$80
  Top 0.254: 28.48,18.45 22.31,18.45 | 28.48,18.45 32.9,18.45 C7.1 | TRF1.7 28.57,18.35 28.48,18.45 | TRF1.2 22.23,18.36 22.31,18.45 | 22.31,18.45 19.65,18.45 19,17.8 17.65,17.8 C47.1
N$160
  Top 0.254: R110.2 R58.1 19.15,12.4 18.1,12.4 17.45,13.05 C48.1
OSC1
  Top 0.254: U9.23 34.23,8.68 35.4,7.5 37.35,7.5 Q102.2
  Top 0.406: Q102.2 40.45,4.4 C105.1
PHY3V3  (via drill 0.35, 0.5, 0.6)
  Top 0.254: U9.28 v30.82,11.93 30.8,11.9 | U9.20 U9.19 | C106.1 37.3,3.6 | R111.2 3.5,20.8 3.4,20.9 v3.4,22.2 3.4,23.4 3.5,23.5 R112.2
  Top 0.305: U9.15 33.5,3.5 34,3 34,2.9 v33.4,2.4 | 33.4,3.5 32.73,3.5
  Top 0.406: U9.25 33.88,9.97 34.6,10.7 34.6,11.6 v34.85,11.85 | 34.9,11.9 v34.85,11.85 | v34.85,11.85 35.8,12.8 36.75,12.8 C108.1 | U9.15 32.73,3.5 33.5,3.5 34.4,2.6 35,2.6 35,2.45 C102.1 | U9.28 33.62,11.93 35.55,13.85 35.55,14.5 C107.1 | Q4.3 42.45,21.75 42.1,21.4 | U9.19 31.07,6.08 30.8,5.8 v30.7,5.8 | L100.1 37.65,19.35 37.6,19.2 37.4,19.4 37.4,20.3 v36.9,21
  Top 0.508: 41.5,21.4 Q4.2 | 42.1,21.4 41.5,21.4 | 41.5,21.4 41.1,21 41.1,19.95 R57.1 40.35,20 | 37.3,3.6 v38.6,3.6
  Top 1.016: R57.1 40.4,19.25 v39.6,18.4
  pour POWER (isolate 0.254): 5.5,25.9 43.4,25.8 43.6,2.3 42.5,1.1 27.2,1.1 26.3,2 14.2,14.4 7.9,20.6 3.3,20.6 2.8,21.1 2.8,23.2
PHY-POWER
  Top 0.254: R62.2 38.6,25.55 38.6,28.8 39.6,29.8 42.8,29.8 44.9,27.7 44.9,21.4 48.4,17.9 J2.8
  Top 0.508: Q4.5 41.5,24.6 41.3,24.4 40.1,24.4 39.5,25 38.75,25 R62.2
PHY_CS  (via drill 0.35)
  Top 0.254: U9.9 23.73,6.72 23.7,6.7 23.96,6.7 v23.89,6.63 | J1.14 8.08,14.12 10.6,11.6 12.1,11.6 14.2,9.5 15.4,9.5 v15.56,9.46
  Bottom 0.254: v15.56,9.46 18.27,6.63 v23.89,6.63
PHY_INTERRUPT  (via drill 0.35)
  Top 0.254: 25.67,10 v23.9,10 | R112.1 4.15,25.3 5.6,25.3 6,24.9 6.52,24.28 J1.6 7.92,24.38 v10.5,21.8
  Top 0.406: U9.4 25.67,10
  Bottom 0.254: v10.5,21.8 10.5,19.2 19.6,10 v23.9,10
PHY_RESET  (via drill 0.35)
  Top 0.254: 25.67,6.1 24.5,6.1 24.3,5.9 v23.1,5.9 | 7.12,18.74 J1.10 | v9.7,14 10.4,14.7 10.4,17.4 9.2,18.6 8.8,18.6 8.2,19.2 J1.10 | R111.1 4.65,18.9 7.5,18.9 7.36,19.05 J1.10
  Top 0.406: U9.10 25.67,6.1
  Bottom 0.254: v23.1,5.9 17.8,5.9 v9.7,14
PHY_SCK  (via drill 0.35)
  Top 0.254: 25.67,7.4 v23.1,7.4 | v14.9,10.4 14.2,10.4 11.9,12.7 11.5,12.7 11.1,13.1 11.1,15 12.7,16.6 13.52,16.6 J1.11
  Top 0.406: U9.8 25.67,7.4
  Bottom 0.254: v23.1,7.4 18.7,7.4 15.7,10.4 v14.9,10.4
PHY_SI  (via drill 0.35)
  Top 0.254: U9.7 23.88,8.03 v23.9,8.1 | J1.12 8.04,16.66 v9.5,15.4
  Bottom 0.254: v23.9,8.1 19.3,8.1 12,15.4 v9.5,15.4
PHY_SO  (via drill 0.35)
  Top 0.254: U9.6 24.43,8.68 24.2,8.9 v23.1,8.9 | v9.68,21.09 8.71,21.09 8.7,21.1 8.13,21.74 J1.8
  Bottom 0.254: v9.68,21.09 9.75,21.05 9.75,19.05 11.43,17.34 19.88,8.9 v23.1,8.9
PHYCLKOUT
  Top 0.305: 25.72,10.6 27.1,10.6 27.4,10.9 27.4,13.4 27.2,13.7
  Top 0.406: U9.3 25.72,10.6 | 27.2,13.7 TP3.TP
RBIAS
  Top 0.406: U9.14 23.02,3.47 R56.2
ROTARY_SWITCH  (via drill 0.35)
  Top 0.254: J1.1 12.84,29.36 11.7,30.5 11.7,39.3 13,40.6 22.6,40.6 23.36,41.36 23.36,43.2 24.91,44.74 27.09,44.74 27.62,44.22 | R27.2 29.55,42.1 29,42.1 28.64,42.46 28.64,43.2 27.62,44.22 | v37.2,47.2 30.6,47.2 27.62,44.22
  Bottom 0.254: v37.2,47.2 37.26,47.76 SW1.C2 SW1.C1
RSSI
  Top 0.254: IC2.5 78.67,14.56 77.1,13 77.1,10.9 75.71,9.51 | 75.71,9.51 75.7,9.5 71.9,9.5 | 71.9,9.5 70,9.5 70,9.2 | 70,9.2 C3.1 | R11.1 72,9.4 71.9,9.5 | J2.11 61.7,13.9 66.1,9.5 69.7,9.5 70,9.2 | TP1.TP 76,9.22 75.71,9.51
RX1
  Top 0.254: C18.2 C17.2 77.4,19.7 80,22.3 84.1,22.3 86.1,20.3 86.1,19.7 85.74,19.7 IC2.16 86.14,19.64 86.2,19.7
RX2
  Top 0.254: IC2.12 86.56,14.56 87.3,15.3 88.55,15.3 C22.1 89.05,15.75 | 89.05,15.55 90.2,14.5 92.85,14.5 C21.1
  Top 0.305: C22.1 89.05,15.55
SCREEN  (via drill 0.35, 1)
  Top 0.61: C34.1 91.83,28.2 v90.3,28.2
  Top 1.016: C13.2 80.5,8.4 v79.1,6.9 80.5,5.5 C25.2
  GNDS 2.54: X6.5 80.76,31.96 77.7,28.9 75.32,28.9 75.1,28.68 73.5,28.68 73.28,28.9 39.14,28.9 X1.7
  POWER 2.54: X6.5 80.76,33.3 85.86,28.2 87.6,28.2 | 87.6,28.2 v90.3,28.2 | 87.6,28.2 87.6,15.4 v79.1,6.9
  Bottom 0.813: IC8.6 19.25,37.75 20.2,36.8 25.5,36.8 26.87,38.17 IC8.3 26.87,38.13 28.2,36.8 31.24,36.8 X1.7
SCREEN1
  Top 1.016: C13.1 89.35,8.4 H3.B4,1 91.25,5.5 C25.1
SPEED
  Top 0.254: X6.1 60.44,24.24 60.3,24.1 59.6,24.1 J2.1
TEMPERATURE
  Top 0.254: J2.3 60.6,21.9 61.8,23.1 61.8,31.1 64.2,33.5 X6.2
TP3V3
  Top 0.254: 34.05,15.9 34,15.95 R105.2 | R104.1 33.55,14.45 34,14.9
  Top 0.406: 34,14.9 34,15.95 | 35.3,16.9 C103.1 | 35.3,16.9 33.6,16.9 arc90 33.55,16.85 R105.2 | L100.2 35.3,18.85 35.3,16.9
TPIN+
  Top 0.254: 25.67,4.1 22,4.1 21,5.1 21,6.95 | 21,6.95 21,14 23.3,16.2 23.3,16.96 TRF1.3 | R110.1 19.5,7.9 20.4,7 20.95,7 21,6.95
  Top 0.406: 25.67,4.1 U9.13
TPIN-  (via drill 0.35)
  Top 0.254: 22.2,4.8 25.67,4.8 | 22.2,4.8 22.2,4.81 | 22.2,4.8 21.6,5.4 21.6,13.4 v22.3,14.1 | R58.2 19.75,13.95 v21.1,15.2
  Top 0.406: 25.67,4.8 U9.12 | v21.1,15.2 21.1,16.7 21.05,16.75 TRF1.1
  Bottom 0.254: v21.1,15.2 v22.3,14.1
TPOUT+
  Top 0.254: U9.17 32.6,4.78 32.52,4.7 30.2,4.7 29.1,5.8 29.1,14.6 29.76,15.26 29.76,16.55 | TRF1.8 29.76,17.07 29.76,16.55 | R105.1 31.51,16.6 29.8,16.6 29.76,16.55
TPOUT-  (via drill 0.35)
  Top 0.254: 32.73,4.1 U9.16 | TRF1.6 27.4,17.06 27.4,16.6 28.59,15.41 v28.59,15.34 28.59,5.51 30,4.1 32.73,4.1 | 32.73,4.1 32.76,4.07 | R104.2 v29.9,14.2
  Bottom 0.254: v29.9,14.2 29.74,14.2 v28.59,15.34
TX_POWER  (via drill 0.35)
  Top 0.254: Q7.1 55.64,40.5 55.64,38.14 v54.9,37.4 | v52.3,20.8 52.3,20.7 52.4,20.7 52.9,20.2 54.7,20.2 J2.6
  Top 0.406: R7.2 55.6,42.1 55.64,42.06 55.64,40.5
  Bottom 0.254: v54.9,37.4 54.9,27.34 52.3,24.73 v52.3,20.8
VIN_FUSED
  Top 0.406: C32.1 11.8,58.1 11.8,57.8 | C31.1 10.2,57.8
  Top 0.813: 17.8,63.6 17.8,64.22 IC6.1 17.7,64.2 C33.1
  Top 1.016: D1.C 10.1,57.74 10.04,57.8 | C9.1 26.7,67.66 26.94,67.9
  Top 1.5: IC7.1 30.6,64.3 30.6,66.5 29.2,67.9 26.94,67.9 19.24,67.9 17.76,66.42 IC6.1 | 17.8,63.6 17.7,63.5 16.6,63.5 15.3,62.2 15.2,61.7 11.8,58.3 11.8,57.8 10.2,57.8 10.16,57.8 10.1,57.74

## Text on the board
Top: TOP COPPER
GNDS: INNER COPPER 1
POWER: INNER COPPER 2
Bottom: BOTTOM
Dimension: PCB 102 x 70mm 4 layer 1.6mm FR4
bPlace: BOTTOM SILK
tNames: TOP SILK | A+T LTD | SPEED DEPTH IF V1.0 (c) 2018
tStop: TOP SOLDER RESIST
bStop: BOTTOM SOLDER RESIST
Document: DEPTH RX | DEPTH TX | SPEED | NMEA | NET | 0V (BLACK) | 12-24 | RX- | RX+ | TX+ | SCREEN | NMEA IN B | NMEA IN A | SPEED (GRN) | SEA TEMP | 5V (RED) | SCREEN | SCREEN | 0V | TX+ | TDCR